# Altium PCB CAO_DMX.PcbDoc
Units mm, origin at the board's own origin, x right, y up, seen from the top; angles counter-clockwise.
Board outline 110 x 39.61 mm, 2 copper layers (Top Layer, Bottom Layer), stack 1.571 mm thick; 66 components, 45 nets, 259 pads, 36 vias.
Unrouted connection lines stored in the file: 1.
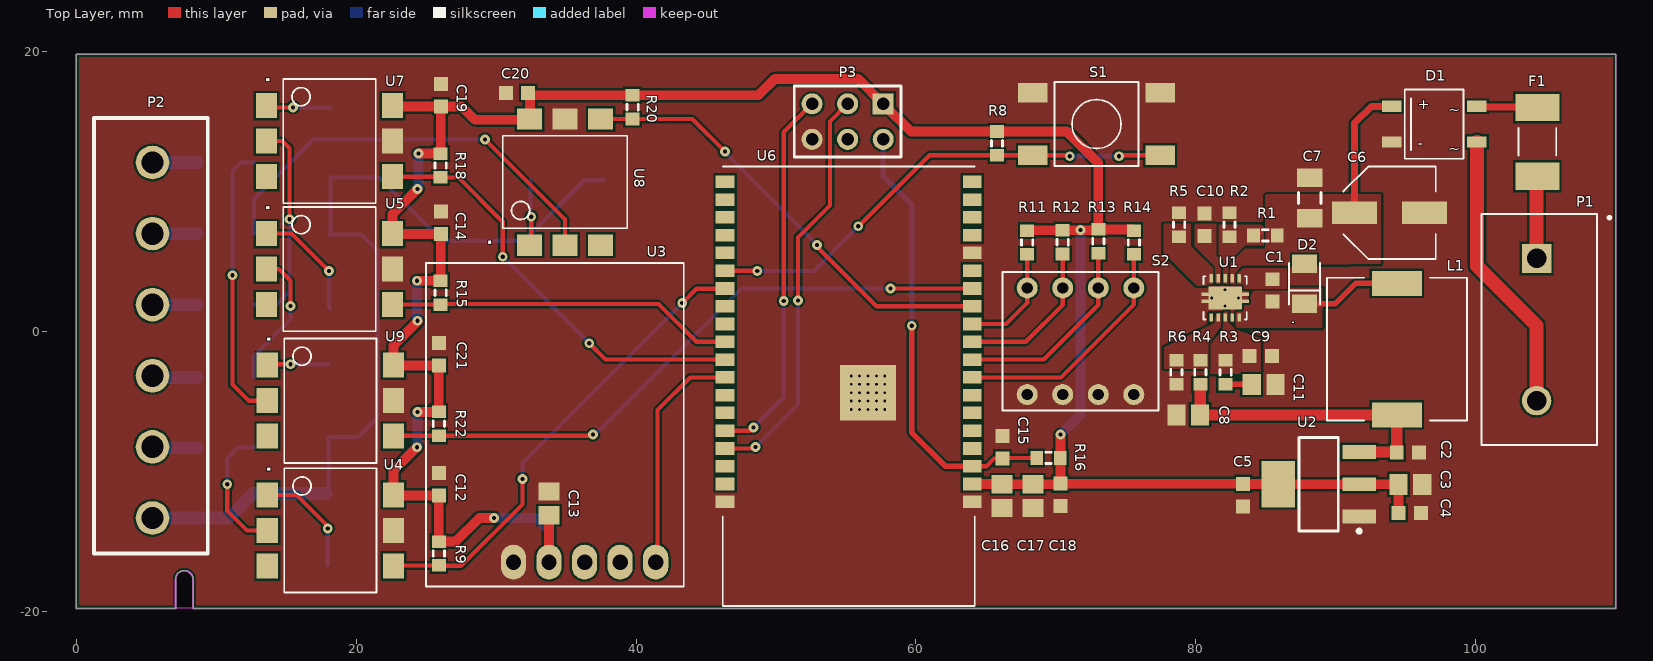
[diagram p0: Top Layer view]
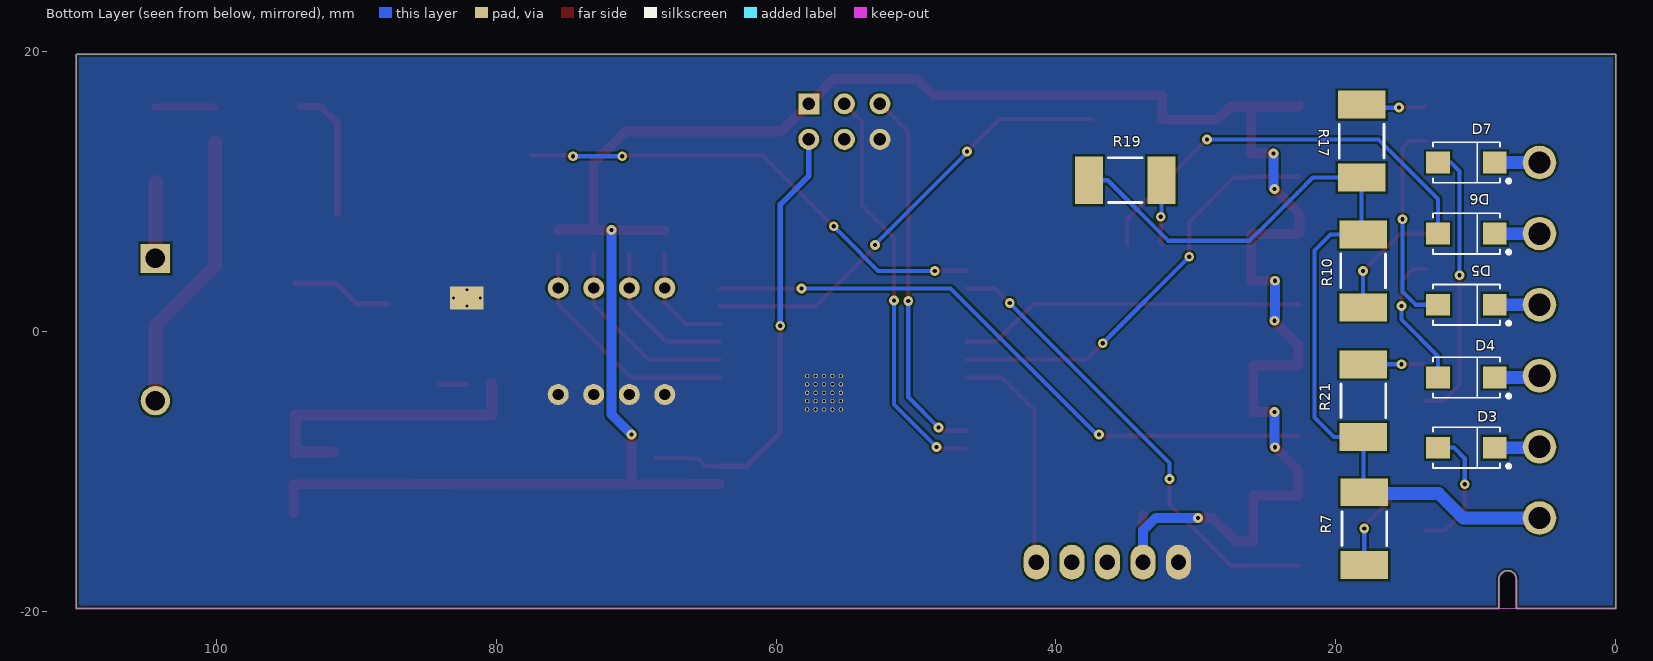
[diagram p1: Bottom Layer view, seen from below]
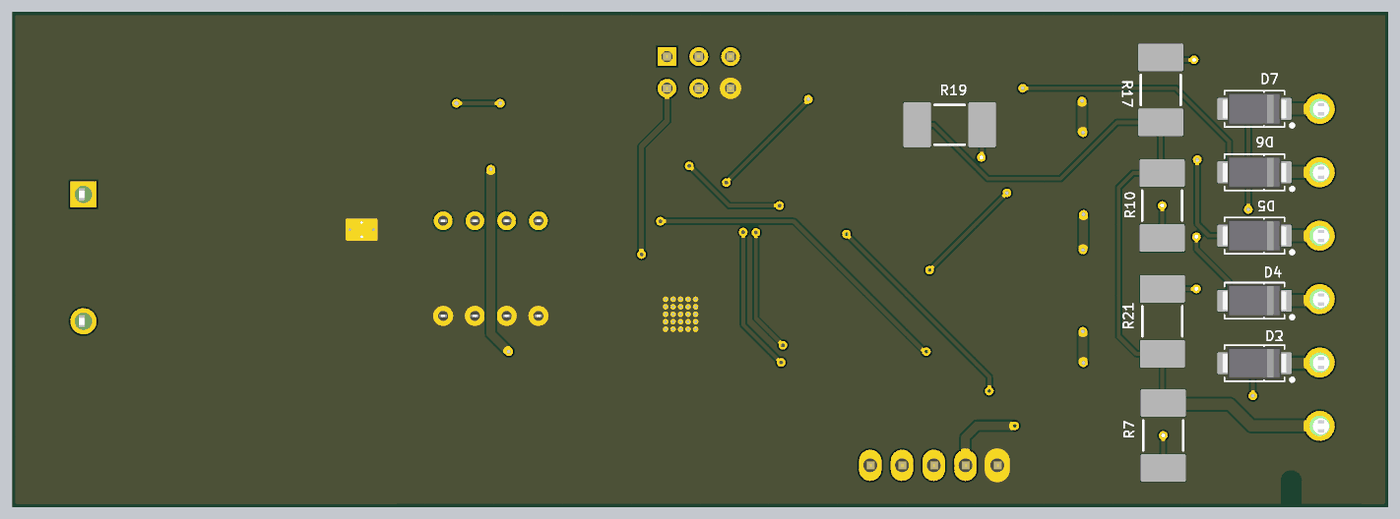
[diagram p2: 3D render of the assembled board from below, using the file's embedded part models]

## Layer stack, top to bottom
Top Solder: solder mask 0.0102, Solder Resist, Dk 3.5
Top Layer: signal copper 0.0356
Dielectric 1: dielectric 1.5, FR-4, Dk 4.8
Bottom Layer: signal copper 0.0356
Bottom Solder: solder mask 0.0102, Solder Resist, Dk 3.5

## Board outline
0,-19.812 0,19.8 110,19.8 110,-19.812 109.982,-19.812 8.349,-19.8 8.349,-17.762 8.35,-17.75 ccw(c7.725,-17.725) 7.1,-17.75 7.104,-17.762 7.104,-19.8
cut-out: 7.104,-19.8 7.104,-17.762 7.1,-17.75 cw(c7.725,-17.725) 8.35,-17.75 8.349,-17.762 8.349,-19.8

## Design rules (kind name [scope] priority, off if disabled: settings)
Clearance [All] p1: gap=0.15 ignorepadtopadclearanceinfootprint=TRUE
MinimumSolderMaskSliver [All] p1: minsoldermaskwidth=0.1
PasteMaskExpansion [All] p1: expansion=0.1
PlaneClearance [All] p1: clearance=0.5
PolygonConnect [All] p1: thpad.connectstyle=Relief thpad.reliefconductorwidth=0.254 thpad.reliefentries=4 thpad.polygonreliefangle="90 Angle" thpad.airgapwidth=0.254 smdpad.connectstyle=Relief smdpad.reliefconductorwidth=0.254 smdpad.reliefentries=4 smdpad.polygonreliefangle="90 Angle" smdpad.airgapwidth=0.254 via.connectstyle=Direct via.reliefconductorwidth=0.254 via.reliefentries=4 via.polygonreliefangle="90 Angle" via.airgapwidth=0.254
RoutingVias [All] p1: holewidth=0.3 width=0.7 viastyle="Through Hole" minholewidth=0.3 minwidth=0.7 maxholewidth=0.3 maxwidth=0.7
SilkToSilkClearance [All] p1: silktosilkclearance=0.2
SilkToSolderMaskClearance [IsPad] p1: minsilkscreentomaskgap=0.1 clearancetoexposedcopper=TRUE
SolderMaskExpansion [All] p1: expansion=0.1 istentingtop=FALSE soldermaskfromhole=TRUE
UnRoutedNet [All] p1: checkbadconnections=TRUE
Width [All] p1: maxlimit=1 minlimit=0.2 preferedwidth=0.3 checkconnectedcopper=TRUE
24 further rules are at their usual default settings.

## Components (designator, comment, footprint, x,y, rotation, side; value= is the part's Value field where it differs from the comment)
C1 "Capacitor" CAPC1608N 85.471,2.921 r270 top
C2 "Capacitor" CAPC1608N 95.15,-8.662 r180 top
C3 "Capacitor" CAPC2012N 95.324,-10.929 r180 top
C4 "Capacitor" CAPC1608N 95.274,-12.975 r180 top
C5 "Capacitor" CAPC1608N 83.38,-11.7 r90 top
C6 "Polarized Capacitor" ECAP_SMD_6.3 93.839,8.47 r0 top
C7 "Capacitor" CAPC3216N 88.138,9.525 r270 top
C8 "Capacitor" CAPC2012N 79.453,-5.969 r0 top
C9 "Capacitor" CAPC1608N 84.645,-1.768 r180 top
C10 "Capacitor" CAPC1608N 80.627,7.62 r270 top
C11 "Capacitor" CAPC2012N 84.836,-3.788 r180 top
C12 "Capacitor" CAPC1608N 25.908,-10.922 r270 top
C13 "Capacitor" CAPC2012N 33.782,-12.29 r270 top
C14 "Capacitor" CAPC1608N 26.053,7.747 r270 top
C15 "Capacitor" CAPC1608N 66.167,-8.276 r270 top
C16 "Capacitor" CAPC2012N 66.162,-11.776 r90 top
C17 "Capacitor" CAPC2012N 68.345,-11.776 r90 top
C18 "Capacitor" CAPC1608N 70.309,-11.687 r90 top
C19 "Capacitor" CAPC1608N 26.053,16.871 r270 top
C20 "Capacitor" CAPC1608N 31.496,17.042 r0 top
C21 "Capacitor" CAPC1608N 25.908,-1.651 r270 top
D1 "MB6S-TP" MB6S 97.028,14.808 r90 top
D2 "SS24FL" SOD-123F 87.757,3.394 r90 top
D3 "US1D" DO-214AC 10.668,-8.309 r0 bottom
D4 "US1D" DO-214AC 10.668,-3.302 r0 bottom
D5 "US1D" DO-214AC 10.668,1.905 r0 bottom
D6 "US1D" DO-214AC 10.668,6.985 r0 bottom
D7 "US1D" DO-214AC 10.668,12.065 r0 bottom
F1 "0452.500NRL" Fuse_NANO2 104.394,13.538 r90 top
L1 "MSS1038-223MLB" MSS1038 94.361,-1.27 r180 top
P1 "24VDC" *TE_282843-2 104.34,0.127 r270 top
P2 "1729160" 1729160 11.05,-15.875 r90 top locked
P3 "UART" HDR2X3 57.658,16.256 r180 top
R1 "Resistor" RESC1608N 84.963,6.858 r0 top
R2 "Resistor" RESC1608N 82.403,7.62 r270 top
R3 "Resistor" RESC1608N 80.312,-2.921 r270 top
R4 "Resistor" RESC1608N 82.12,-2.921 r90 top
R5 "Resistor" RESC1608N 78.801,7.62 r270 top
R6 "Resistor" RESC1608N 78.598,-2.921 r90 top
R7 "Resistor" RESC6432N 17.966,-14.097 r90 bottom
R8 "Resistor" RESC1608N 65.786,13.429 r90 top
R9 "Resistor" RESC1608N 25.908,-15.875 r90 top
R10 "Resistor" RESC6432N 18.053,4.318 r90 bottom
R11 "Resistor" RESC1608N 67.945,6.35 r90 top
R12 "Resistor" RESC1608N 70.485,6.376 r90 top
R13 "Resistor" RESC1608N 73.025,6.432 r90 top
R14 "Resistor" RESC1608N 75.565,6.35 r90 top
R15 "Resistor" RESC1608N 26.035,2.762 r90 top
R16 "Resistor" RESC1608N 69.466,-9.045 r0 top
R17 "Resistor" RESC6432N 18.161,13.589 r270 bottom
R18 "Resistor" RESC1608N 26.035,11.848 r90 top
R19 "Resistor" RESC6432N 35.052,10.795 r0 bottom
R20 "Resistor" RESC1608N 39.751,16.021 r90 top
R21 "Resistor" RESC6432N 18.034,-4.953 r270 bottom
R22 "Resistor" RESC1608N 25.908,-6.604 r90 top
S1 "Switch" FSM4 72.898,14.809 r270 top
S2 "SW-4-SPST-NO" 418117270904 71.755,-0.709 r180 top
U1 "TPS54140" VSON-10 82.086,2.39 r270 top
U2 "TLV1117" SOT223 88.769,-10.926 r180 top
U3 "Milight" MILIGHT_RF_MODULE 43.402,-18.231 r90 top
U4 "c" DIP-6 18.161,-14.224 r270 top
U5 "H11L1SR2M" DIP-6 18.098,4.445 r270 top
U6 "ESP32-WROVER" ESP32-WROVER 64.192,11.782 r180 top
U7 "H11L1SR2M" DIP-6 18.098,13.589 r270 top
U8 "H11L1SR2M" DIP-6 34.925,10.668 r0 top
U9 "H11L1SR2M" DIP-6 18.161,-4.953 r270 top

## Footprints (in the part's own frame and the unit in brackets; to place one, negate y for a bottom-side part, rotate by r counter-clockwise, add the part's x,y. Pads: shape width x height; smd on the part's side, far side on the other; paste and mask are expansions set on the pad)
1729160 [mm]
  round 2.4 hole 1.6: 1(2.54,5.6) 2(7.62,5.6) 3(12.7,5.6) 4(17.78,5.6) 5(22.86,5.6) 6(27.94,5.6)
  silkscreen extent 0,1.65 31.12,9.78, body extent -0.03,1.65 31.02,9.75, height 10
418117270904 [mm]
  round 1.5 hole 0.8 mask+0.05: 1(-3.81,3.81) 2(-1.27,3.81) 3(1.27,3.81) 4(3.81,3.81) 5(-3.81,-3.81) 6(-1.27,-3.81) 7(1.27,-3.81) 8(3.81,-3.81)
  silkscreen extent -5.58,-4.95 5.58,4.95, body extent -5.58,-4.95 5.58,4.95, height 6.9
*TE_282843-2 [mm]
  rect 2.1x2.1 hole 1.4: 1(-5.08,0)
  round 2.1 hole 1.4: 2(5.08,0)
  silkscreen extent -8.26,-3.94 8.26,5.31, body extent -8.22,-3.91 8.22,4.19, height 10
CAPC1608N [mm] "Chip Capacitor, Body 1.6x0.8mm, IPC Medium Density"
  rect 1x1 smd: 1(-0.8,0) 2(0.8,0)
  body extent -0.87,-0.48 0.87,0.48, height 0.85
CAPC2012N [mm] "Chip Capacitor, Body 2.0x1.3mm, IPC Medium Density"
  rect 1.3x1.5 smd: 1(-0.85,0) 2(0.85,0)
  body extent -1.1,-0.72 1.1,0.72, height 1.1
CAPC3216N [mm] "Chip Capacitor, Body 3.2x1.6mm, IPC Medium Density"
  rect 1.3x1.8 smd: 1(-1.45,0) 2(1.45,0)
  silkscreen extent -0.4,-0.8 0.4,0.8, body extent -1.7,-0.9 1.7,0.9, height 1.35
DIP-6 [mm]
  rect 1.78x1.52 smd mask+0.05: 1(-2.54,-4.509) 2(0,-4.508) 3(2.54,-4.508) 4(2.54,4.509) 5(0,4.508) 6(-2.54,4.508)
  silkscreen extent -4.45,-3.3 4.45,3.3, body extent -3.56,-4.94 3.56,4.94, height 3.82
DO-214AC [mm] "Molded Diode, 2-Leads, Body 4,50x2,71mm, IPC Medium Density"
  rect 1.7x1.55 smd: 1(2.025,0) 2(-2.025,0)
  silkscreen extent -3.14,-1.45 2.4,1.45, body extent -2.6,-1.3 2.6,1.3, height 2.4
ECAP_SMD_6.3 [mm]
  rect 3.2x1.6 smd: 1(-2.5,0) 2(2.5,0)
  silkscreen extent -3.3,-3.3 3.3,3.3, body extent -3.48,-3.3 3.52,3.3, height 3.91
ESP32-WROVER [mm]
  rect 1.35x0.9 smd mask+0.07: 1(0.175,23.96) 2(0.175,22.69) 3(0.175,21.42) 4(0.175,20.15) 5(0.175,18.88) 6(0.175,17.61) 7(0.175,16.34) 8(0.175,15.07) 9(0.175,13.8) 10(0.175,12.53) 11(0.175,11.26) 12(0.175,9.99) 13(0.175,8.72) 14(0.175,7.45) 15(0.175,6.18) 16(0.175,4.91) 17(0.175,3.64) 18(0.175,2.37) 19(0.175,1.1) 20(17.825,1.1) 21(17.825,2.37) 22(17.825,3.64) 23(17.825,4.91) 24(17.825,6.18) 25(17.825,7.45) 26(17.825,8.72) 27(17.825,9.99) 28(17.825,11.26) 29(17.825,12.53) 30(17.825,13.8) 31(17.825,15.07) 32(17.825,16.34) 33(17.825,17.61) 34(17.825,18.88) 35(17.825,20.15) 36(17.825,21.42) 37(17.825,22.69) 38(17.825,23.96)
  round 0.3 hole 0.2 mask+0.07: 39(6.42,14.97) 39(6.42,15.57) 39(6.42,16.17) 39(6.42,16.77) 39(6.42,17.37) 39(7.02,14.97) 39(7.02,15.57) 39(7.02,16.17) 39(7.02,16.77) 39(7.02,17.37) 39(7.62,14.97) 39(7.62,15.57) 39(7.62,16.17) 39(7.62,16.77) 39(7.62,17.37) 39(8.22,14.97) 39(8.22,15.57) 39(8.22,16.17) 39(8.22,16.77) 39(8.22,17.37) 39(8.82,14.97) 39(8.82,15.57) 39(8.82,16.17) 39(8.82,16.77) 39(8.82,17.37)
  rect 4x4 smd mask+0.07: 39(7.62,16.17)
  silkscreen extent 0,0 18,31.4, body extent 0,0 18,31.4, height 3.65
FSM4 [mm]
  rect 1.4x2.1 smd mask+0.07: 1(2.23,4.55) 1(2.23,-4.55) 2(-2.23,4.55) 2(-2.23,-4.55)
  silkscreen extent -3,-3 3,3, body extent -3,-5 3,5, height 5.1
Fuse_NANO2 [mm]
  rect 1.96x3.15 smd mask+0.07: 1(-2.455,0) 2(2.455,0)
  silkscreen extent -1,-1.35 1,1.35, body extent -3.05,-1.35 3.05,1.35, height 2.7
HDR2X3 [mm] "Connector; Header; 3x2 Position"
  rect 1.5x1.5 hole 0.9: 1(0,0)
  round 1.5 hole 0.9: 2(0,2.54) 3(2.54,0) 4(2.54,2.54) 5(5.08,0) 6(5.08,2.54)
  silkscreen extent -1.27,-1.27 6.35,3.81, body extent -1.27,-1.27 6.35,3.81, height 8.67
MB6S [mm]
  rect 0.8x1.4 smd mask+0: 1(1.27,3.05) 2(-1.27,-3.05) 3(-1.27,3.05) 4(1.27,-3.05)
  silkscreen extent -2.47,-2.1 2.47,2.1, body extent -2.48,-3.52 2.47,3.52, height 2.7
MILIGHT_RF_MODULE [mm]
  oval 2.5x1.8 hole 1.1: 1(1.74,2) 2(1.74,4.54) 3(1.74,7.08) 4(1.74,9.62) 5(1.74,12.16)
  silkscreen extent 0,0 23.11,18.41, body extent -1.12,0 23.11,18.41, height 7.55
MSS1038 [mm]
  rect 3.56x1.78 smd mask+0.07: 1(0,-4.7) 2(0,4.7)
  silkscreen extent -5,-5.1 5,5.1, body extent -5.1,-5.15 5.1,5.15, height 4
RESC1608N [mm] "Chip Resistor, Body 1.6x0.8mm, IPC Medium Density"
  rect 0.9x1 smd: 1(-0.85,0) 2(0.85,0)
  silkscreen extent -0.2,-0.4 0.2,0.4, body extent -0.85,-0.48 0.85,0.48, height 0.6
RESC6432N [mm] "Chip Resistor, Body 6.4x3.2mm, IPC Medium Density"
  rect 2x3.4 smd: 1(-2.6,0) 2(2.6,0)
  silkscreen extent -1.2,-1.6 1.2,1.6, body extent -3.3,-1.7 3.3,1.7, height 1.2
SOD-123F [mm]
  rect 1.34x1.8 smd paste-0.025 mask+0.07: 1(1.43,0) 2(-1.43,0)
  silkscreen extent -1.5,-1.1 1.5,1.1, body extent -1.85,-0.8 1.85,0.8, height 1.27
SOT223 [mm]
  rect 2.4x1 smd: 1(-2.9,2.3) 2(-2.9,0) 3(-2.9,-2.3)
  rect 2.4x3.3 smd: 2(2.9,0)
  silkscreen extent -3.03,-3.35 1.4,3.47, body extent -3.37,-3.3 3.63,3.2, height 1.86
VSON-10 [mm]
  rrect20% 0.6x0.24 smd mask+0.07: 1(-1.4,1) 2(-1.4,0.5) 3(-1.4,0) 4(-1.4,-0.5) 5(-1.4,-1) 6(1.4,-1) 7(1.4,-0.5) 8(1.4,0) 9(1.4,0.5) 10(1.4,1)
  round 0.3 hole 0.2 mask+0.07: 11(-0.575,0) 11(0,0.95) 11(0,-0.95) 11(0.575,0)
  rrect5% 0.25x0.34 on Top Paste mask+0.07: 11(-0.25,1.53) 11(-0.25,-1.53) 11(0.25,1.53) 11(0.25,-1.53)
  rrect5% 0.25x3.4 smd paste-5 mask+0.07: 11(-0.25,0) 11(0.25,0)
  rrect5% 1.5x1.06 on Top Paste mask+0.07: 11(0,0.63) 11(0,-0.63)
  rrect5% 1.65x2.4 smd paste-5 mask+0.07: 11(0,0)
  rrect5% 1.65x2.4 smd far side paste-5 mask+0.07: 11(0,0)
  silkscreen extent -1.55,-1.55 1.55,1.55, body extent -1.5,-1.5 1.5,1.5, height 0.9

## Part data
C1: library part CAP-000000040, Value 1=100nF, Value 2=10V, DES="C0603X104K8RACTU -  Condensateur cÃ©ramique multicouche CMS, 0.1 ÂµF, 10 V, 0603 [1608 Metric], Â± 10%, X7R", FTP=0603, MAN=KEMET, MANREF=C0603X104K8RACTU, NOTE=_, Part Number=CAP-000000040, SUP=Farnell, SUPREF=2904937, TOL=10%
C2 C4 C12 C14 C15 C18 C19 C20 C21: library part CAP-000000003, Value 1=100nF, Value 2=50V, DES="MULTICOMP  MC0603F104Z500CT  CONDENSATEUR MLCC Y5V 100NF 0603", FTP=0603, MAN=MULTICOMP, MANREF=MC0603F104Z500CT, NOTE=_, Part Number=CAP-000000003, SUP=Farnell, SUPREF=1759123, TOL="+80% -20%"
C3 C13 C16 C17: library part CAP-000000042, Value 1=10uF, Value 2=6.3V, DES="MCTT21X106M6R3CT -  Condensateur cÃ©ramique multicouche CMS, 10 ÂµF, 6.3 V, 0805 [2012 Metric], Â± 20%, X5R, SÃ©rie MCTT", FTP=0805, MAN=MULTICOMP, MANREF=MCTT21X106M6R3CT, NOTE=_, Part Number=CAP-000000042, SUP=Farnell, SUPREF=1759476, TOL=20%
C5: library part CAP-000000002, Value 1=10nF, Value 2=50V, DES="MULTICOMP  MC0603B103K500CT  CONDENSATEUR MLCC X7R 10NF 50V 0603", FTP=0603, MAN=MULTICOMP, MANREF=MC0603B103K500CT, NOTE=_, Part Number=CAP-000000002, SUP=Farnell, SUPREF=1759102, TOL=10%
C6: library part CAP-000000008, Value 1=100uF, Value 2=35V, DES="PANASONIC ELECTRONIC COMPONENTS  EEEFK1V101XP  CONDENSATEUR ELEC ALU 100UF 35V CMS", FTP="SMD Size D8", MAN=PANASONIC, MANREF=EEEFK1V101XP, NOTE=_, Part Number=CAP-000000008, SUP=Farnell, SUPREF=1850114, TOL=20%
C7: library part CAP-000000036, Value 1=3.3uF, Value 2=100V, DES="Multilayer Ceramic Capacitors MLCC - SMD/SMT CGA 1206 100V 3.3uF X7S 20% AEC-Q200", FTP=1206, MAN=TDK, MANREF=CGA5L3X7S2A335M160AB, NOTE=_, Part Number=CAP-000000036, SUP=Mouser, SUPREF=810-CGA5L3X7S2A335MB, TOL=20%
C8: library part CAP-000000041, Value 1=47uF, Value 2=10V, DES="GRM21BR61A476ME15L -  Condensateur cÃ©ramique multicouche CMS, 47 ÂµF, 10 V, 0805 [2012 Metric], Â± 20%, X5R, GRM Series", FTP=0805, MAN=MURATA, MANREF=GRM21BR61A476ME15L, NOTE=_, Part Number=CAP-000000041, SUP=Farnell, SUPREF=2611939, TOL=20%
C9: library part CAP-000000037, Value 1=6.8pF, Value 2=100V, DES="Multilayer Ceramic Capacitors MLCC - SMD/SMT 100V 6.8pF C0G 0603 .1pF Tol", FTP=0603, MAN=AVX, MANREF=06031U6R8BAT2A, NOTE=_, Part Number=CAP-000000037, SUP=Mouser, SUPREF=581-06031U6R8BAT2A, TOL=_
C10: library part CAP-000000039, Value 1=6.8nF, Value 2=50V, DES="C0603X682K5GECAUTO -  Condensateur cÃ©ramique multicouche CMS, ESD, AEC-Q200, 6800 pF, 50 V, 0603 [1608 Metric], Â± 10%", FTP=0603, MAN=KEMET, MANREF=C0603X682K5GECAUTO, NOTE=_, Part Number=CAP-000000039, SUP=Farnell, SUPREF=2760504, TOL=10%
C11: library part CAP-000000038, Value 1=2nF, Value 2=25V, DES="C0805C202J3GACTU -  Condensateur cÃ©ramique multicouche CMS, 2000 pF, 25 V, 0805 [2012 Metric], Â± 5%, C0G / NP0", FTP=0805, MAN=KEMET, MANREF=C0805C202J3GACTU, NOTE=_, Part Number=CAP-000000038, SUP=Farnell, SUPREF=2905236, TOL=5%
D1: library part DIB-000000002, "Full Wave Diode Bridge", Value 1=0.5A, Value 2=600V, DES="Redresseurs en pont .5A 600V", FTP=MBS-1, MAN="Micro Commercial Components (MCC)", MANREF=MB6S-TP, NOTE=_, Part Number=DIB-000000002, SUP=Mouser, SUPREF=833-MB6S-TP, TOL=_
D2: library part DIS-000000016, "Schottky Diode", Value 1=2A, Value 2=40V, DES="Schottky Diodes & Rectifiers 40V, 2A SCHOTTKY", FTP=SOD-123-2, MAN="ON Semiconductor / Fairchild", MANREF=SS24FL, NOTE=_, Part Number=DIS-000000016, SUP=Mouser, SUPREF=512-SS24FL, TOL=_
D3 D4 D5 D6 D7: library part DIR-000000002, "Diode", Value 1=1A, Value 2=200V, DES="Diode Fast / U, 200 V, 1 A, Une, 1 V, 50 ns, 30 A", FTP=DO-214AC, MAN=MULTICOMP, MANREF=US1D, NOTE=_, Part Number=DIR-000000002, SUP=Farnell, SUPREF=1625280, TOL=_
F1: library part FUS-000000002, "Fuse", Value 1=500mA, Value 2=32VDC, DES="0452.500NRL -  Fusible / Montage en surface, SÃ©rie NANO2, 500 mA, 125 VAC, 32 VDC, TemporisÃ©, CMS", FTP=_, MAN=LITTELFUSE, MANREF=0452.500NRL, NOTE=_, Part Number=FUS-000000002, SUP=Farnell, SUPREF=9922326, TOL=_
L1: library part IND-000000012, "Inductor", Value 1=22uH, Value 2=2.85A, DES="Fixed Inductors MSS1038 SMT Shielded 22 uH 20 % 2.85 A", FTP=_, MAN=Coilcraft, MANREF=MSS1038-223MLB, NOTE=_, Part Number=IND-000000012, SUP=Mouser, SUPREF=994-MSS1038-223MLB, TOL=20%
P1: library part CON-000000036, "Header, 2-Pin", Value 1=2pts, Value 2="10.16 mm", DES="Fixed Terminal Blocks WR-TBL Terminal Block - Rising Cage - THT 2 Positions 10.16 mm Pitch 14A", FTP=THT, MAN="Wurth Elektronik", MANREF="691213610002 /  / 39910-0102", NOTE=_, Part Number=CON-000000036, SUP=Mouser, SUPREF=710-691213610002, TOL=_
P2: library part CON-000000035, "Header, 6-Pin", Value 1=6pts, Value 2="5.08 mm", DES="Fixed Terminal Blocks 6P 5.08mm 90DEG", FTP=THT, MAN="Phoenix Contact", MANREF=1729160, NOTE=_, Part Number=CON-000000035, SUP=Mouser, SUPREF=651-1729160, TOL=_
P3: library part CON-000000012, "Header, 3-Pin, Dual row", Value 1=6pts, Value 2=_, DES="Embases et logements de cÃ¢bles WR-PHD 2.54mm Hdr 6P Dual Str Gold", FTP=THT, MAN="Wurth Electronics", MANREF=61300621121, NOTE=_, Part Number=CON-000000012, SUP=Mouser, SUPREF=710-61300621121, TOL=_
R1 R4: library part RES-000000070, Value 1=105K, Value 2=0.1W, DES="ERJ3EKF1053V -  RÃ©sistance Ã  puce CMS, Couche Ã©paisse, 105 kohm, SÃ©rie ERJ3E, 75 V, Couche Ã©paisse", FTP=0603, MAN="PANASONIC ELECTRONIC COMPONENT", MANREF=ERJ3EKF1053V, NOTE=_, Part Number=RES-000000070, SUP=Farnell, SUPREF=2059494, TOL=1%
R2: library part RES-000000085, Value 1=15K4, Value 2=0.1W, DES="CRCW060315K4FKEA. -  RÃ©sistance Ã  puce CMS, Couche Ã©paisse, 0603 [1608 Metric], 15.4 kohm, SÃ©rie CRCW, 75 V", FTP=0603, MAN=VISHAY, MANREF=CRCW060315K4FKEA, NOTE=_, Part Number=RES-000000085, SUP=Farnell, SUPREF=2138431, TOL=1%
R3: library part RES-000000086, Value 1=56K2, Value 2=0.1W, DES="MCWR06X5622FTL -  RÃ©sistance Ã  puce CMS, 56.2 kohm, MCWR06 Series, 75 V, Couche Ã©paisse, 0603 [1608 Metric], 100 mW", FTP=0603, MAN="MCWR06X5622FTL -  RÃ©sistance Ã  puce CMS, 56.2 kohm, MCWR06 Series, 75 V, Couche Ã©paisse, 0603 [1608 Metric], 100 mW", MANREF=MCWR06X5622FTL, NOTE=_, Part Number=RES-000000086, SUP=Farnell, SUPREF=2694903, TOL=1%
R5: library part RES-000000084, Value 1=182K, Value 2=0.1W, DES="ERJ3EKF1823V -  RÃ©sistance Ã  puce CMS, Couche Ã©paisse, 182 kohm, SÃ©rie ERJ3E, 75 V, Couche Ã©paisse", FTP=0603, MAN="PANASONIC ELECTRONIC COMPONENTS", MANREF=ERJ3EKF1823V, NOTE=_, Part Number=RES-000000084, SUP=Farnell, SUPREF=2059508, TOL=1%
R6 R8 R11 R12 R13 R14 R16: library part RES-000000003, Value 1=10K, Value 2=0.1W, DES="YAGEO (PHYCOMP)  RC0603FR-0710KL  RESISTANCE COUCHE EPAISSE 10K 0.1W 1%", FTP=0603, MAN=YAGEO, MANREF=RC0603FR-0710KL, NOTE=_, Part Number=RES-000000003, SUP=Farnell, SUPREF=9238603, TOL=1%
R7 R10 R17 R19 R21: library part RES-000000095, Value 1=1K2, Value 2=1W, DES="ERJ1TYJ122U -  RÃ©sistance Ã  puce CMS, Couche Ã©paisse, 2512 [6432 Metric], 1.2 kohm, SÃ©rie ERJ1T, 200 V", FTP=2512, MAN=PANASONIC, MANREF=ERJ1TYJ122U, NOTE=_, Part Number=RES-000000095, SUP=Farnell, SUPREF=2324174, TOL=5%
R9 R15 R18 R20 R22: library part RES-000000094, Value 1=270R, Value 2=0.1W, DES="CRCW0603270RFKEA. -  RÃ©sistance Ã  puce CMS, Couche Ã©paisse, 0603 [1608 Metric], 270 ohm, SÃ©rie CRCW, 75 V", FTP=0603, MAN=VISHAY, MANREF=CRCW0603270RFKEA, NOTE=_, Part Number=RES-000000094, SUP=Farnell, SUPREF=2141320, TOL=1%
S1: library part MIS-000000020, Value 1=_, DES="FSM4JSMA -  Commutateur tactile, SÃ©rie FSMJSMA, A dÃ©clencheur supÃ©rieur, Montage en surface, Bouton rond", FTP=_, MAN="ALCOSWITCH - TE CONNECTIVITY", MANREF=FSM4JSMA, NOTE=_, Part Number=MIS-000000020, SUP=Farnell, SUPREF=3801305, TOL=_, Value 2=_
S2: library part SWC-000000004, Value 1=_, DES="Commutateurs DIL/Commutateurs SIL WS-DITV DIP 4p THT 2.54mm Hrztl Box", FTP=_, MAN="Wurth Elektronik", MANREF=418117270904, NOTE=_, Part Number=SWC-000000004, SUP=Mouser, SUPREF=710-418117270904, TOL=_, Value 2=_
U1: library part ICP-000000006, "4-V to 40-V, 1-A Step-Down Converter With High Efficiency Eco-Mode", Value 1=_, DES="Switching Voltage Regulators 3.5-42Vin,1.5A SD Converter", FTP=VSON-10, MAN="Texas Instruments", MANREF=TPS54140ADRCT, NOTE=_, Part Number=ICP-000000006, SUP=Mouser, SUPREF=595-TPS54140ADRCT, TOL=_, Value 2=_
U2: library part VRG-000000001, "Voltage Regulator", Value 1=3.3V, Value 2=1A, DES="TEXAS INSTRUMENTS  TLV1117LV33DCYR  LDO FIXE 3.3V 1A SOT-223-4", FTP=SOT-223, MAN="Texas Instrument", MANREF=TLV1117LV33DCYR, NOTE=_, Part Number=VRG-000000001, SUP=Farnell, SUPREF=3122356, TOL=_
U3: library part RFC-000000003, Value 1=_, DES="RF Module", FTP=_, MAN=Milight, MANREF=PCB-KH01, NOTE=_, Part Number=RFC-000000003, SUP=Deliled, SUPREF=PCB-KH01, TOL=_, Value 2=_
U4 U5 U7 U8 U9: library part OPT-000000005, "Schmitt Trigger Output Optocoupler", Value 1=_, DES="H11L1SR2M -  Optocoupleur, 1 voie, 7.5 kV, Montage en surface DIP, 6 Broche(s)", FTP=DIP-6, MAN="ON SEMICONDUCTOR", NOTE=_, Part Number=OPT-000000005, SUP=Farnell, SUPREF=1086683, TOL=_, Value 2=_
  U4: MANREF=c
  U5 U7 U8 U9: MANREF=H11L1SR2M
U6: library part RFC-000000002, "Modules WiFi / 802.11 SMD Module, ESP32-D0WDQ6, 32Mbits PSRAM, 32Mbits SPI flash, PCB Antenna", Value 1=_, DES="Modules WiFi / 802.11 SMD Module, ESP32-D0WDQ6, 32Mbits PSRAM, 32Mbits SPI flash, PCB Antenna", FTP=_, MAN="Espressif Systems", MANREF=ESP32-WROVER, NOTE=_, Part Number=RFC-000000002, SUP="ASTONE TECHNOLOGY", SUPREF=ESP32-WROVER, TOL=_, Value 2=_

## Via types
v1: diameter 0.7, hole 0.3, Top Layer to Bottom Layer, 36 vias

## Nets (pads, with @x,y where several pads share a name; then routed paths per layer and width w, separated by ;. In a path a pad name is that pad's centre, name@x,y a point inside that pad or via, vN(x,y) a via of type N, cw(c..) or ccw(c..) an arc to the next point about the centre after c; other vN are vias at no path point)
3.3V: C3.2 C4.2 C5.2 C12.2 C13.2 C14.2 C16.2 C17.2 C18.2 C19.2 C20.2 C21.2 P3.1 R8.2 R9.2 R11.2 R12.2 R13.2 R14.2 R15.2 R16.2 R18.2 R20.2 R22.2 U2.2 U3.4 U4.6 U5.6 U6.2 U7.6 U8.6 U9.6 | length 181.8
  Top Layer w0.7: U7.6 22.664,16.071 C19.2 ; v1(24.349,-8.276) 22.669,-9.955 U4.6 22.707,-11.722 C12.2 R9.2 27.11,-15.025 28.808,-13.327 v1(29.845,-13.327) ; v1(24.349,3.612) R15.2 26.053,3.63 C14.2 22.644,6.947 U5.6 22.606,8.382 v1(24.384,10.16) ; v1(24.384,0.762) 24.384,0.694 22.669,-1.021 U9.6 22.707,-2.451 C21.2 R22.2 v1(24.388,-5.754) ; v1(24.459,12.698) R18.2 26.053,12.716 C19.2 ; U3.4 C13.2 ; U6.2 66.144,-10.908 C16.2 68.345,-10.926 70.27,-10.926 C18.2 ; R11.2 67.971,7.226 R12.2 72.969,7.226 R13.2 ; v1(70.316,-7.381) R16.2 70.316,-10.88 C18.2 ; R14.2 75.483,7.282 R13.2 ; C4.2 C3.2 91.672,-10.929 91.669,-10.926 85.869,-10.926 85.843,-10.9 C5.2 83.366,-10.887 C18.2 ; C19.2 27.539,16.071 28.498,15.112 32.321,15.112 U8.6 32.423,15.214 32.423,16.871 R20.2 48.748,16.871 49.911,18.034 55.88,18.034 P3.1 59.635,14.279 R8.2 70.767,14.279 73.025,12.021 R13.2
  Bottom Layer w0.254: v1(24.384,0.762) 24.384,0.782 24.467,0.865 v1@24.384,0.948 ; v1(24.384,10.16) v1@24.441,10.217
  Bottom Layer w0.7: v1(24.349,-8.276) 24.388,-8.237 v1(24.388,-5.754) ; v1(24.349,3.612) 24.349,0.983 v1@24.384,0.948 ; v1@24.441,10.217 24.459,10.235 v1(24.459,12.698) ; v1(29.845,-13.327) 32.872,-13.327 33.782,-14.236 U3.4 ; v1(70.316,-7.381) 71.755,-5.942 v1(71.755,7.234)
5V: C2.2 C8.2 L1.2 R3.2 U2.3 | length 21.7
  Top Layer w0.8: R3.2 80.312,-5.96 C8.2 80.304,-5.97 L1.2 94.35,-5.981 C2.2 94.314,-8.626 U2.3
BOOT: R8.1 S1.1 U6.25 | length 34.6
  Top Layer w0.254: v1@48.641,4.332 v1(48.655,4.318) ; v1(74.502,12.514) v1@74.567,12.579
  Top Layer w0.3: U6.25 v1@48.641,4.332 ; v1(55.88,7.507) 60.952,12.579 R8.1 70.928,12.579 v1(70.993,12.514) ; v1@74.567,12.579 S1.1@77.448,12.579
  Bottom Layer w0.3: v1(48.655,4.318) 52.703,4.318 55.118,6.733 55.118,6.745 v1(55.88,7.507) ; v1(70.993,12.514) v1(74.502,12.514)
EN: C15.2 P3.2 R16.1 U6.3 | length 32
  Top Layer w0.3: U6.3 65.038,-9.638 65.581,-9.095 66.167,-9.095 66.217,-9.045 R16.1
  Top Layer w0.4: v1(59.692,0.404) 59.692,-7.227 62.103,-9.638 U6.3
  Bottom Layer w0.4: P3.2 57.658,11.103 59.692,9.069 v1(59.692,0.404)
GND: C2.1 C3.1 C4.1 C5.1 C6.2 C7.1 C8.1 C9.1 C10.1 C11.1 C12.1 C13.1 C14.1 C15.1 C16.1 C17.1 C18.1 C19.1 C20.1 C21.1 D1.3 D2.1 P3.6 R2.1 R5.1 R6.1 S1.2 S2.1 S2.2 S2.3 S2.4 U1.9 U1.11@81.136,2.39 U1.11@82.086,1.815 U1.11@82.086,2.14 U1.11@82.086,2.39 U1.11@82.086,2.64 U1.11@82.086,2.965 U1.11@83.036,2.39 U2.1 U3.5 U4.5 U5.5 U6.1 U6.15 U6.38 U6.39 U7.5 U8.5 U9.5
IN1: D3.2 P2.2 | length 3.2
  Bottom Layer w0.254: P2.2 P2.2@5.504,-8.309
  Bottom Layer w0.9: P2.2@5.504,-8.309 D3.2
IN2: D4.2 P2.3 | length 3.2
  Bottom Layer w0.254: P2.3 P2.3@5.577,-3.302
  Bottom Layer w0.9: P2.3@5.577,-3.302 D4.2
IN3: D5.2 P2.4 | length 3.2
  Bottom Layer w0.9: P2.4 D5.2
IN4: D6.2 P2.5 | length 3.2
  Bottom Layer w0.9: P2.5 D6.2
IN5: D7.2 P2.6 | length 3.2
  Bottom Layer w0.9: P2.6 D7.2
MIL_RX: U3.1 U6.31 | length 16.7
  Top Layer w0.3: U3.1 41.529,-16.364 41.529,-5.631 43.872,-3.288 U6.31
NetC1_1: C1.1 U1.1
NetC1_2: C1.2 D2.2 L1.1 U1.10 | length 7.2
  Top Layer w0.4: D2.2 89.949,1.964 91.415,3.43 L1.1
NetC9_2: C9.2 R4.2 U1.8
NetC10_2: C10.2 U1.4
NetC11_2: C11.2 R4.1 | length 1.9
  Top Layer w0.3: C11.2@83.969,-3.771 C11.2
  Top Layer w0.4: R4.1 C11.2@83.969,-3.771
NetD1_2: D1.2 P1.2 | length 20.3
  Top Layer w1: D1.2 100.078,4.674 104.34,0.412 P1.2
NetD1_4: D1.4 F1.2 | length 4.3
  Top Layer w0.254: D1.4 D1.4@100.112,16.044
  Top Layer w0.5: D1.4@100.112,16.044 F1.2@104.394,16.044
NetD3_1: D3.1 U4.2 | length 9.4
  Top Layer w0.3: v1(10.797,-10.922) 10.797,-12.829 12.192,-14.224 U4.2
  Bottom Layer w0.3: v1(10.797,-10.922) 10.797,-9.071 11.559,-8.309 D3.1
NetD4_1: D4.1 U5.2 | length 10.1
  Top Layer w0.3: U5.2 14.478,4.445 15.307,3.616 v1(15.307,1.815)
  Bottom Layer w0.3: D4.1 12.693,-1.778 15.307,0.836 v1(15.307,1.815)
NetD5_1: D5.1 U7.2 | length 15
  Top Layer w0.3: U7.2 14.732,13.589 15.24,13.081 v1(15.24,8.001)
  Bottom Layer w0.3: D5.1 14.312,1.905 15.24,2.833 v1(15.24,8.001)
NetD6_1: D6.1 U8.2 | length 30.7
  Top Layer w0.3: v1(29.21,13.716) 34.925,8.001 U8.2
  Bottom Layer w0.3: D6.1 12.693,9.465 16.944,13.716 v1(29.21,13.716)
NetD7_1: D7.1 U9.2 | length 20
  Top Layer w0.3: v1(11.157,4.009) 11.157,-3.791 12.319,-4.953 U9.2
  Bottom Layer w0.3: v1(11.157,4.009) 11.157,11.44 11.782,12.065 D7.1
NetF1_1: F1.1 P1.1 | length 5.5
  Top Layer w1: P1.1 F1.1@104.34,10.68
NetR1_1: R1.1 R2.2 U1.3
NetR3_1: R3.1 R6.2 U1.7
NetR5_2: R5.2 U1.5
NetR7_1: R7.1 U4.1 | length 8
  Top Layer w0.3: U4.1 15.748,-11.684 17.966,-13.902 v1(17.966,-14.097)
  Bottom Layer w0.3: R7.1 v1(17.966,-14.097)
NetR10_1: R10.1 U5.1 | length 8.3
  Top Layer w0.3: U5.1 15.386,6.985 v1(18.053,4.318)
  Bottom Layer w0.254: R10.1@18.053,1.699 R10.1@18.161,1.591
  Bottom Layer w0.3: R10.1@18.053,1.699 v1(18.053,4.318)
NetR17_1: R17.1 U7.1 | length 4.6
  Top Layer w0.254: U7.1 U7.1@13.716,16.002
  Top Layer w0.3: U7.1@13.716,16.002 v1(15.494,16.002)
  Bottom Layer w0.254: v1(15.494,16.002) v1@15.516,15.98
  Bottom Layer w0.3: v1@15.516,15.98 R17.1@18.161,15.98
NetR19_1: R19.1 U8.1 | length 4.7
  Top Layer w0.254: U8.1 U8.1@32.512,6.286
  Top Layer w0.3: U8.1@32.512,6.286 v1(32.512,8.182)
  Bottom Layer w0.254: v1@32.452,8.242 v1(32.512,8.182)
  Bottom Layer w0.3: v1@32.452,8.242 R19.1
NetR21_1: R21.1 U9.1 | length 4.4
  Top Layer w0.254: U9.1 U9.1@13.712,-2.353
  Top Layer w0.3: U9.1@13.712,-2.353 v1(15.307,-2.353)
  Bottom Layer w0.3: v1(15.307,-2.353) R21.1
O1: R9.1 U4.4 U6.26 | length 33.7
  Top Layer w0.3: U4.4 22.709,-16.725 R9.1 ; R9.1@25.908,-16.752 27.496,-16.752 31.877,-12.371 v1(31.877,-10.541) ; v1(43.307,2.032) 44.319,3.044 46.349,3.044 U6.26
  Bottom Layer w0.3: v1(31.877,-10.541) 31.877,-9.398 v1(43.307,2.032)
O2: R15.1 U5.4 U6.29 | length 24.9
  Top Layer w0.3: U5.4 22.613,1.912 R15.1 ; R15.1@26.035,1.944 41.617,1.944 44.309,-0.748 U6.29
O3: R18.1 U6.30 U7.4 | length 30.6
  Top Layer w0.3: U7.4 25.984,11.049 R18.1 27.304,10.998 30.471,7.831 v1(30.471,5.334) ; v1(36.657,-0.852) 37.823,-2.018 U6.30
  Bottom Layer w0.3: v1(30.471,5.334) v1(36.657,-0.852)
O4: R20.1 U6.12 U8.4 | length 32.2
  Top Layer w0.3: U8.4 37.47,15.171 R20.1 44.017,15.171 v1(46.349,12.839) ; v1(52.922,6.159) 52.922,6.043 57.173,1.792 U6.12
  Bottom Layer w0.3: v1(46.349,12.839) 46.349,12.779 52.922,6.206 v1(52.922,6.159)
O5: R22.1 U6.13 U9.4 | length 45.7
  Top Layer w0.3: U9.4 22.708,-7.454 R22.1 36.846,-7.454 v1(36.919,-7.38) ; v1(58.188,3.062) U6.13
  Bottom Layer w0.3: v1(36.919,-7.38) 37.083,-7.38 47.525,3.062 v1(58.188,3.062)
RXD0: P3.5 U6.34 | length 27
  Top Layer w0.3: U6.34 48.16,-7.098 v1(48.387,-6.871) ; v1(50.546,2.16) 50.546,14.224 P3.5
  Bottom Layer w0.3: v1(48.387,-6.871) 50.546,-4.712 v1(50.546,2.16)
TXD0: P3.3 U6.35 | length 29.4
  Top Layer w0.3: U6.35 48.411,-8.368 v1(48.524,-8.255) ; v1(51.562,2.193) 51.562,6.712 53.848,8.998 53.848,14.986 P3.3
  Bottom Layer w0.3: v1(48.524,-8.255) 51.562,-5.217 v1(51.562,2.193)
V_IN: C6.1 C7.2 D1.1 R1.2 U1.2 | length 9.5
  Top Layer w0.5: C6.1 91.339,14.885 92.532,16.078 D1.1
VLED_IN: P2.1 R7.2 R10.2 R17.2 R19.2 R21.2 | length 64.4
  Bottom Layer w0.3: P2.1 P2.1@5.458,-13.327 ; R7.2 18.034,-11.429 R21.2 20.133,-7.553 21.533,-6.153 21.533,5.772 20.387,6.918 R10.2 18.161,7.026 R17.2 21.65,10.989 22.778,9.861 22.778,9.854 25.027,7.605 25.034,7.605 26.162,6.477 31.983,6.477 36.301,10.795 R19.2
  Bottom Layer w0.9: P2.1 10.91,-13.335 12.662,-11.584 R7.2@17.879,-11.584
Z0: R14.1 S2.5 U6.8 | length 17.3
  Top Layer w0.3: U6.8 70.349,-3.288 75.565,1.928 S2.5 R14.1
Z1: R13.1 S2.6 U6.9 | length 14.3
  Top Layer w0.3: U6.9 69.132,-2.018 73.025,1.875 S2.6 73.025,5.005 R13.1
Z2: R12.1 S2.7 U6.10 | length 11.2
  Top Layer w0.3: U6.10 67.846,-0.748 70.485,1.891 S2.7 R12.1
Z3: R11.1 S2.8 U6.11 | length 8
  Top Layer w0.3: U6.11 66.435,0.522 67.945,2.032 S2.8 R11.1
pads on no net: P3.4 U1.6 U1.11@80.556,2.14 U1.11@80.556,2.64 U1.11@81.456,2.39 U1.11@82.716,2.39 U1.11@83.616,2.14 U1.11@83.616,2.64 U3.2 U3.3 U4.3 U5.3 U6.4 U6.5 U6.6 U6.7 U6.14 U6.16 U6.17 U6.18 U6.19 U6.20 U6.21 U6.22 U6.23 U6.24 U6.27 U6.28 U6.32 U6.33 U6.36 U6.37 U7.3 U8.3 U9.3

## Polygon pours and split planes (outlines as drawn)
GND on Top Layer "GND_L01_P092" (solid, remove dead copper, pour order 92): 0,19.912 0,-19.712 5.588,-19.712 7.366,-19.712 109.982,-19.712 109.982,19.912
V_IN on Top Layer "V_IN_L01_P076" (solid, remove dead copper, pour order 76): 82.403,3.327 82.779,3.327 82.804,3.352 82.804,4.191 83.287,4.674 93.218,4.817 93.218,9.779 84.963,9.779 84.963,5.896 83.436,5.896 82.403,4.863
NetC9_2 on Top Layer "NETC9_2_L01_P084" (solid, remove dead copper, pour order 84): 81.813,1.447 82.315,1.44 82.315,0.639 82.446,0.508 82.661,0.293 82.803,0.151 83.171,0.023 84.645,-0.488 84.645,-3.048 81.026,-3.048 81.026,-0.845 81.867,-0.005 81.867,1.26 81.841,1.285
NetC1_2 on Top Layer "NETC1_2_L01_P080" (solid, remove dead copper, pour order 80): 89.027,3.101 84.351,3.101 82.847,1.597 82.847,0.24 89.027,0.24
NetC1_1 on Top Layer "NETC1_1_L01_P078" (solid, remove dead copper, pour order 78): 82.866,3.415 82.903,3.457 82.903,4.036 83.439,4.572 86.487,4.572 86.487,3.048 83.233,3.048
NetR1_1 on Top Layer "NETR1_1_L01_P072" (solid, remove dead copper, pour order 72): 81.837,3.412 82.296,3.412 82.296,4.945 83.51,6.159 84.836,6.159 84.836,7.447 84.663,7.62 81.636,7.62 81.636,5.5 81.854,5.282 81.867,5.253
NetC10_2 on Top Layer "NETC10_2_L01_P070" (solid, remove dead copper, pour order 70): 81.35,3.394 81.803,3.394 81.838,3.429 81.788,3.479 81.788,5.08 81.444,5.424 81.444,7.671 79.929,7.671 79.929,6.088 81.35,4.667
NetR5_2 on Top Layer "NETR5_2_L01_P068" (solid, remove dead copper, pour order 68): 79.637,7.671 79.269,7.671 77.689,7.671 77.689,5.622 80.043,3.267 81.223,3.267 81.35,3.394 81.223,3.521 81.223,4.502 79.637,6.088
NetR3_1 on Top Layer "NETR3_1_L01_P062" (solid, remove dead copper, pour order 62): 81.841,1.285 81.476,1.285 81.3,0.58 77.724,-1.143 77.724,-2.667 80.899,-2.667 80.899,-0.87 81.788,0.31
V_IN on Top Layer "V_IN_L01_P056" (solid, pour order 56): 84.218,6.66 84.382,6.66 84.907,7.185 84.907,7.35
GND on Bottom Layer "GND_L02_P086" (solid, remove dead copper, pour order 86): 0,19.812 0,-19.812 5.588,-19.812 7.366,-19.812 109.982,-19.812 109.982,19.812

## Keep-outs
Keep-Out Layer:
  lines w0.127: 7.1,-17.75 cw(c7.725,-17.725) 8.35,-17.75 ; 7.104,-17.762 7.104,-19.8 0,-19.812 0,19.8 110,19.8 110,-19.812 ; 8.349,-17.762 8.349,-19.8 109.982,-19.812

## Text inside footprints (layer, text, board x,y; h text height)
D1: Top Overlay "~" at 98.044,12.7 h0.76; Top Overlay "~" at 98.044,15.468 h0.76; Top Overlay "-" at 95.86,13.081 h0.76; Top Overlay "+" at 95.86,15.875 h0.76